# Altium PCB Copy of WoodStoveLayout1.PcbDoc (part 5 of 5)
Units mil, origin at the board's own origin, x right, y up, seen from the top; angles counter-clockwise.
Board outline 4000 x 3000 mil, 4 copper layers (Top Layer, LGND, LPWR, Bottom Layer), stack 64.6 mil thick; 132 components, 92 nets, 551 pads, 393 vias.
Unrouted connection lines stored in the file: 127.
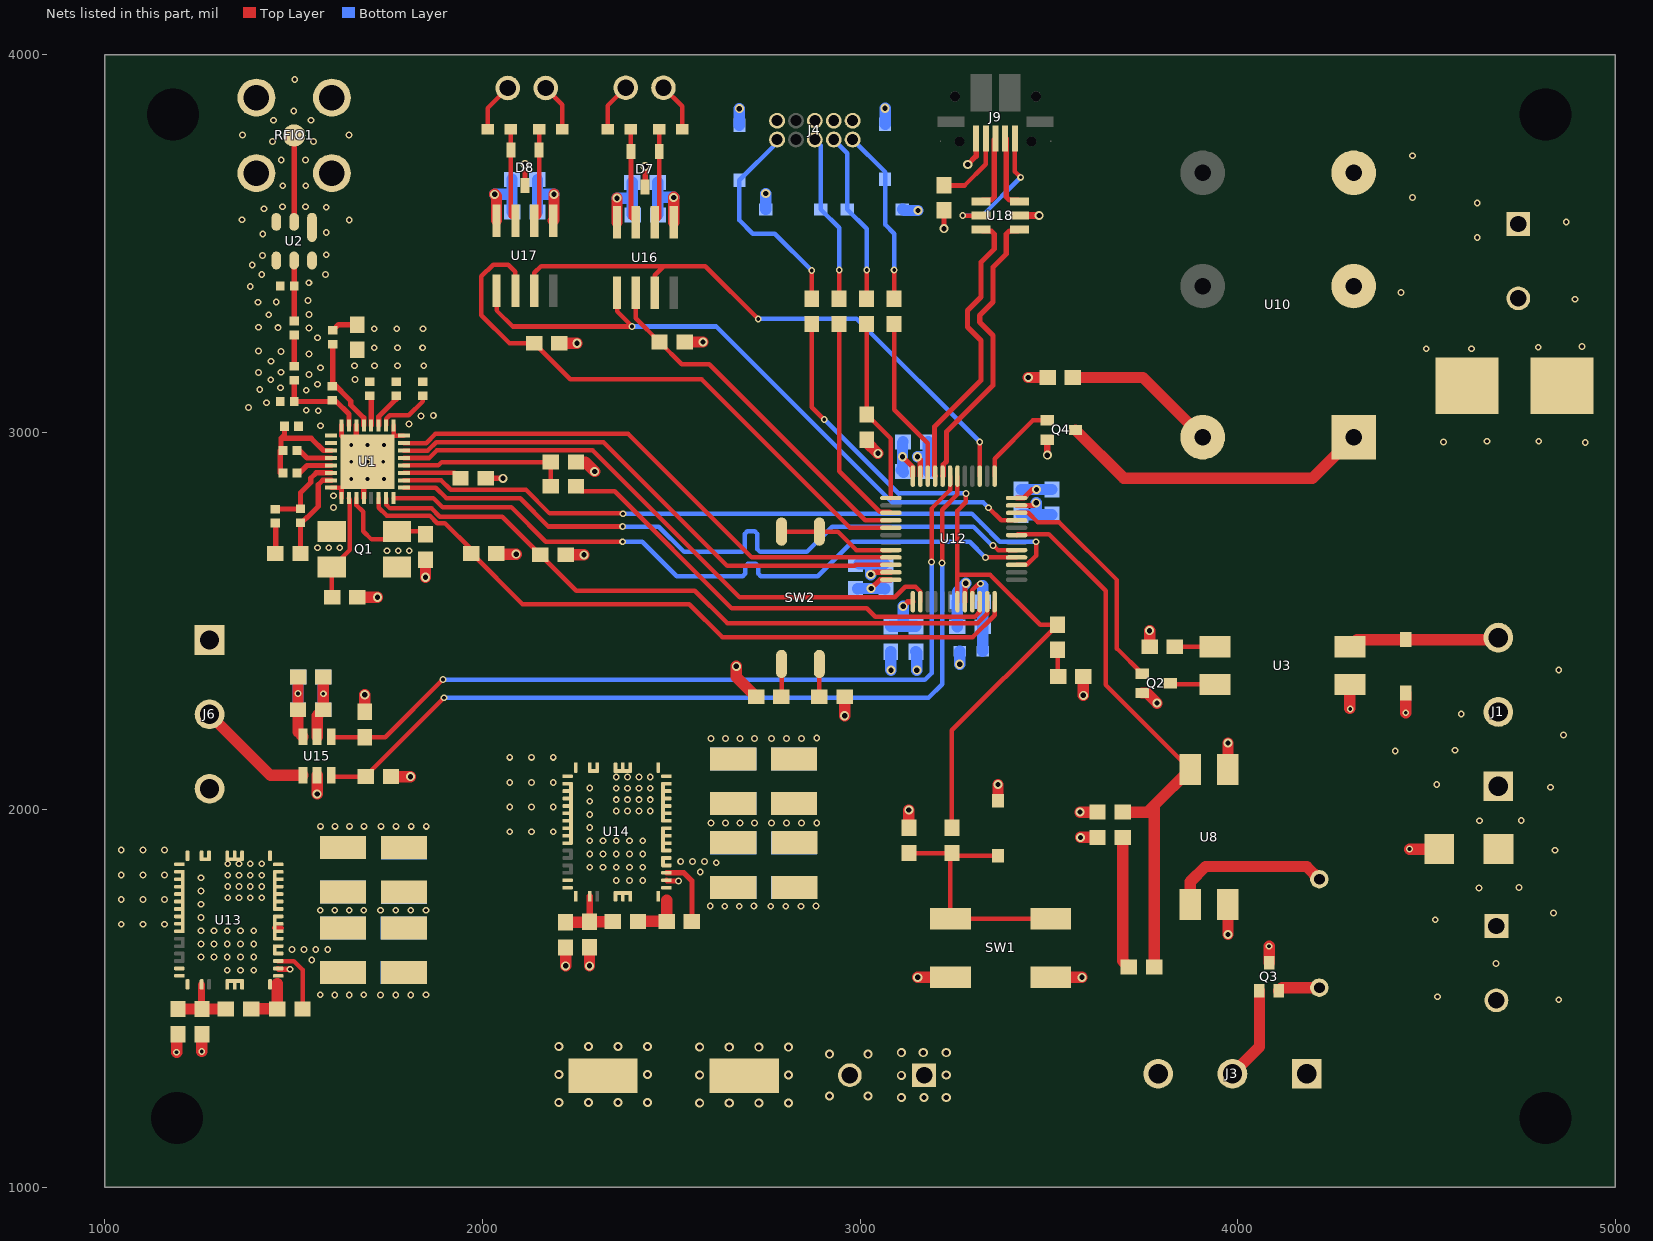
[diagram p4: the nets of this part, all layers, seen from the top]

## Polygon pours and split planes (outlines as drawn) (continued)
+5V on LPWR "LPWR-+5V" (solid, pour order 38): 1023,2550 1450,2550 1450,2486.46 1511.46,2425 1625,2425 1625,2075 1675,2025 1895,2025 1895,1828 1898,1825 1550,1825 1550,1800 1480,1730 1416,1730 1416,1301 1224,1301 1023,1301
12VFAN on LPWR "12FANPOWERPLANE" (solid, pour order 119): 4118,2708 4124,2702 4974,2702 4974,1388 4118,1388
+12V on LPWR "LPWR-+12V 1" (solid, pour order 115): 3768,1420 3766.77,1421.23 3766.77,1930 4295,1930 4296,1931 4299,1928 4299,1420
+3V3 on LPWR "LPWR-+3V3 1" (solid, pour order 161): 2060.2,1540.2 2060.39,1540 2451,1540 2451,1669.8 2441.8,1679 2061,1679
GND on LPWR "LPWR-GND" (solid, pour order 36): 1225,1860 1299.38,1860 1299.38,1730 1301.38,1728 1478,1728 1550,1800 1550,1825 1893.76,1825 1895,1823.76 1895,1647 1433,1647 1430,1650 1427,1647 1427,1437.6 1225,1437.6
GND on LPWR "LPWR-GND 1" (solid, pour order 107): 2255.53,2094.76 2255.53,1671 2460,1671 2460,1880 3050,1880 3050,2050 2580,2050 2500,1970 2330,1970 2325.24,1974.76 2325.24,2094.76
+3V3 on Bottom Layer "Bottom Layer-+3V3" (solid, pour order 159): 2327.09,1968.13 2330.56,1971.6 2911,1971.6 2911,2259.42 2457.33,2259.42 2325.52,2127.61
+5V on Bottom Layer "Bottom Layer-+5V 2" (solid, pour order 157): 1301.81,1730.81 1305.28,1734.28 1896.26,1734.28 1896.26,2020.31 1893.26,2023.31 1892.05,2022.1 1432.05,2022.1 1300.23,1890.29
FANGND on Bottom Layer "FANBTMLAYER" (solid, pour order 123): 4142,2702 4996,2702 4998,2700 4998,1385 4149,1385 4144,1390
GND on Bottom Layer "Bottom Layer-GND 1" (solid, pour order 147): 2255.53,2094.76 2255.53,1671 2460,1671 2460,1880 2913,1880 2913,2050 2580,2050 2500,1970 2330,1970 2325.24,1974.76 2325.24,2094.76
GND on Bottom Layer "Bottom Layer-GND" (solid, pour order 135): 1225,1860 1299.38,1860 1299.38,1730 1301.38,1728 1478,1728 1550,1800 1550,1825 1893.76,1825 1895,1823.76 1895,1647 1433,1647 1430,1650 1427,1647 1427,1437.6 1225,1437.6
3VSWRelief on Bottom Layer "Bottom Layer-3VSWRelief" (solid, pour order 155): 1960.89,2243 2318,2243 2318,1907.5 2314,1903.5 1958.3,1903.5
5VSWRelief on Bottom Layer "Bottom Layer-5VSWRelief" (solid, pour order 149): 1002.44,1988 1288,1988 1288,1671 1284,1667 1000,1667
+12V on Bottom Layer "Bottom Layer-+12V" (solid, pour order 137): 2505,1878 2505,1709 2912,1709 2912,1878
+12V on Bottom Layer "Bottom Layer-+12V" (solid, pour order 113): 1445,1646 1445,1474 1898,1474 1898,1646
no net on Top Layer "Top Layer-GND 1" (solid, pour order 199): 1313,3997 1694,3997 1694,3501 1315.01,3501
GND on Top Layer "Top Layer-GND 14" (solid, pour order 197): 2743,3869.15 3027,3869.15 3027,3733 2743,3733
GND on Top Layer "Top Layer-GND 15" (solid, pour order 195): 1191,2139 1372,2139 1433,2078 1433,2015 1347,1929 1192,1929
12VFAN on Top Layer "Top Layer-12VFAN" (solid, pour order 193): 4142,2701 4997,2701 4997,1385 4996,1386 4468,1386 4468,1480 4467,1481 4319,1481 4319,1949 4318,1950 4141,1950
GND on Top Layer "Top Layer-GND 16" (solid, pour order 189): 3062,1412 3277,1412 3277,1190 3062,1190
GND on Top Layer "Top Layer-GND 17" (solid, pour order 187): 2163,1415 2479,1415 2479,1188 2163,1188
GND on Top Layer "Top Layer-GND 6" (solid, pour order 79): 1603.33,3495 1510,3495 1510,3087 1603.33,3087
GND on Top Layer "Top Layer-GND 4" (solid, pour order 83): 1491.73,3241 1351.5,3241 1351,3241.5 1350.5,3241 1350.5,3043 1584,3043 1633,3009 1633,3050.94 1603.53,3080.41 1593.12,3070 1491.73,3070
GND on Top Layer "Top Layer-GND 2" (solid, pour order 129): 1576.74,2857.06 1639,2857.06 1638,2856.06 1638,2773 1565,2773
GND on Top Layer "Top Layer-GND 11" (solid, pour order 125): 1563,2764 1545,2764 1545,2678 1544,2677 1643,2677 1643,2765
GND on Top Layer "Top Layer-GND 3" (solid, pour order 95): 1501,3035.34 1580.3,3035.34 1625.61,2990.03 1625.61,2965 1584,2965 1556.57,2997 1501.55,2997
GND on Top Layer "Top Layer-GND 5" (solid, pour order 81): 1494,3493 1350,3493 1350,3248 1351,3247 1352,3248 1495.4,3248
+3V3 on Top Layer "Top Layer-+3V3" (solid, pour order 67): 1897,3103 1897,3005 1740,3005 1740,3042 1755,3057 1798,3057 1798,3103
+5V on Top Layer "Top Layer-+5V" (solid, pour order 109): 1301.81,1730.81 1305.28,1734.28 1896.26,1734.28 1896.26,2020.31 1893.26,2023.31 1892.05,2022.1 1432.05,2022.1 1300.23,1890.29
+12V on Top Layer "Top Layer-+12V" (solid, pour order 103): 2487.4,1879.05 2911,1879.05 2911,1862.04 2911,1707.05 2486.41,1707.05
+3V3 on Top Layer "Top Layer-+5V" (solid, pour order 99): 2327.09,1968.13 2330.56,1971.6 2911,1971.6 2911,2259.42 2457.33,2259.42 2325.52,2127.61
GND on Top Layer "Top Layer-GND 13" (solid, pour order 169): 2337,1758.1 2213.67,1758.1 2210,1754.43 2210,1823.22 2336.71,1823.22
GND on Top Layer "Top Layer-GND 12" (solid, pour order 165): 1307.21,1523.88 1183.88,1523.88 1183,1523 1183,1589 1306.92,1589
3VSWRelief on Top Layer "Top Layer-5VSWRelief 1" (solid, pour order 105): 2030,2167.57 2320.7,2167.57 2320.7,1904.98 2030,1904.98
5VSWRelief on Top Layer "Top Layer-5VSWRelief 1" (solid, pour order 65): 1000,1931.57 1290.7,1931.57 1290.7,1668.98 1000,1668.98
+12V on Top Layer "Top Layer-+12V" (solid, pour order 59): 1452.49,1645 1898,1645 1896.5,1643.5 1896.5,1473 1451.5,1473
GND on Top Layer "Top Layer-GND 9" (solid, pour order 69): 1736,3307 1736,3297 1736,3121 1649,3121 1642,3128 1642,3242 1692,3242 1693,3241 1693,3307
+12V on Top Layer "Top Layer-+12V 1" (solid, pour order 133): 2545,1412 3057,1412 3057,1190 2545,1190
GND on Top Layer "Top Layer-GND 10" (solid, pour order 127): 1725,2700 1822,2700 1822,2614 1823,2613 1726,2613
GND on Top Layer "Top Layer-GND" (solid, pour order 97): 2432,1945.48 2501.8,1945.48 2587,2030.68 2587,2051.59 2910,2051.59 2910,2041.02 2910,1881 2432,1881
GND on Top Layer "Top Layer-GND 7" (solid, pour order 75): 1811,3122 1811,3305.54 1875,3305.54 1875,3122
GND on Top Layer "Top Layer-GND 8" (solid, pour order 71): 1745,3122 1745,3305.54 1744.54,3306 1804,3306 1804,3122
GND on Top Layer "Top Layer-GND" (solid, pour order 41): 1420,1717.8 1489.8,1717.8 1562,1790 1562,1816.18 1894.83,1816.18 1898,1813.34 1898,1658.69 1420,1658.69

## Other copper
Top Layer:
  region net ACFUSE: 4151.43,3500 4450,3500 4450,3439.59 4700,3189.59 4700,2900 4500,2900 4500,3150 4450,3200 4150.71,3200
  region net "AC In": 4700,3428.37 4700,3250 4750,3250 4750,2900 4950,2900 4950,3428.37
  region net "AC Out": 4150,3798.59 4150,3550 4151.43,3551.43 4500,3551.43 4500,3482.81 4950,3482.81 4950,3649.12 4607.41,3649.12 4607.41,3800
  region net ACFUSE: 4151.43,3477.5
LGND:
  pour cut-out: 925,3668
  pour cut-out: 1000,4000 1310,4000 1311,3999 1311,3700 1002,3700 1001,3699
  pour cut-out: 1000,1301 1001,1300 1425,1300 1425,1001.59 1422.41,999 1421.41,1000 1000,1000
LPWR:
  pour cut-out: 1025,2560.2 1025.78,2559.42 1923.42,2559.42 1926,2562 1926,2821.37 1753.37,2994 1704,2994 1704,3144.3 1890.3,3144.3 1961,3215 1961,3969 1025,3969
  pour cut-out: 1310,4000 1310,3700 1309.59,3699.59 1000,3699.59 1000,4000
Bottom Layer:
  region net ACFUSE: 4151.43,3500 4450,3500 4450,3439.59 4700,3189.59 4700,2900 4500,2900 4500,3150 4450,3200 4150.71,3200
  region net "AC In": 4700,3428.37 4700,3250 4750,3250 4750,2900 4950,2900 4950,3428.37
  region net "AC Out": 4150,3798.59 4150,3550 4151.43,3551.43 4500,3551.43 4500,3482.81 4950,3482.81 4950,3649.12 4607.41,3649.12 4607.41,3800

## Silkscreen, mask and mechanical layers (free items; w line width, h text height)
Top Overlay:
  lines w30: 3644,3980 3644,2731 3645,2730 5000,2730
  text "HIGH VOLTAGE" at 4005,3906 h60
  text "AC OUT" at 4753,3705 h30
  text "AC IN" at 4958,3284 h30 r90
  text "FAN POWER" at 4647,2583 h30
  text "PBLU" at 4931,2419 h30 r90
  text "-BLK" at 4931,2201.5 h30 r90
  text "+RED" at 4931,1984 h30 r90
  text "+12FAN" at 4931,1646 h30 r90
  text "GNDFAN" at 4931,1400 h30 r90
  text "DOOR SENSOR" at 4366,1143 h30 r90
  text "-Blu" at 3716,1081 h30
  text "Blk" at 3952,1081 h30
  text "+Brn" at 4141,1081 h30
  text "+12V" at 2921,1058 h30
  text "GND" at 3135,1058 h30

## Text inside footprints (layer, text, board x,y; h text height)
J4: Top Overlay "1" at 3011,3953 h73.82 r270; Top Overlay "2" at 3039,3657 h73.82 r180